# Altium PCB 九键触摸面板-触摸板-V1.PcbDoc
Units mm, origin at the board's own origin, x right, y up, seen from the top; angles counter-clockwise.
Board outline 77.48 x 77.48 mm, 2 copper layers (Top Layer, Bottom Layer), stack 1.571 mm thick; 46 components, 39 nets, 113 pads, 156 vias.
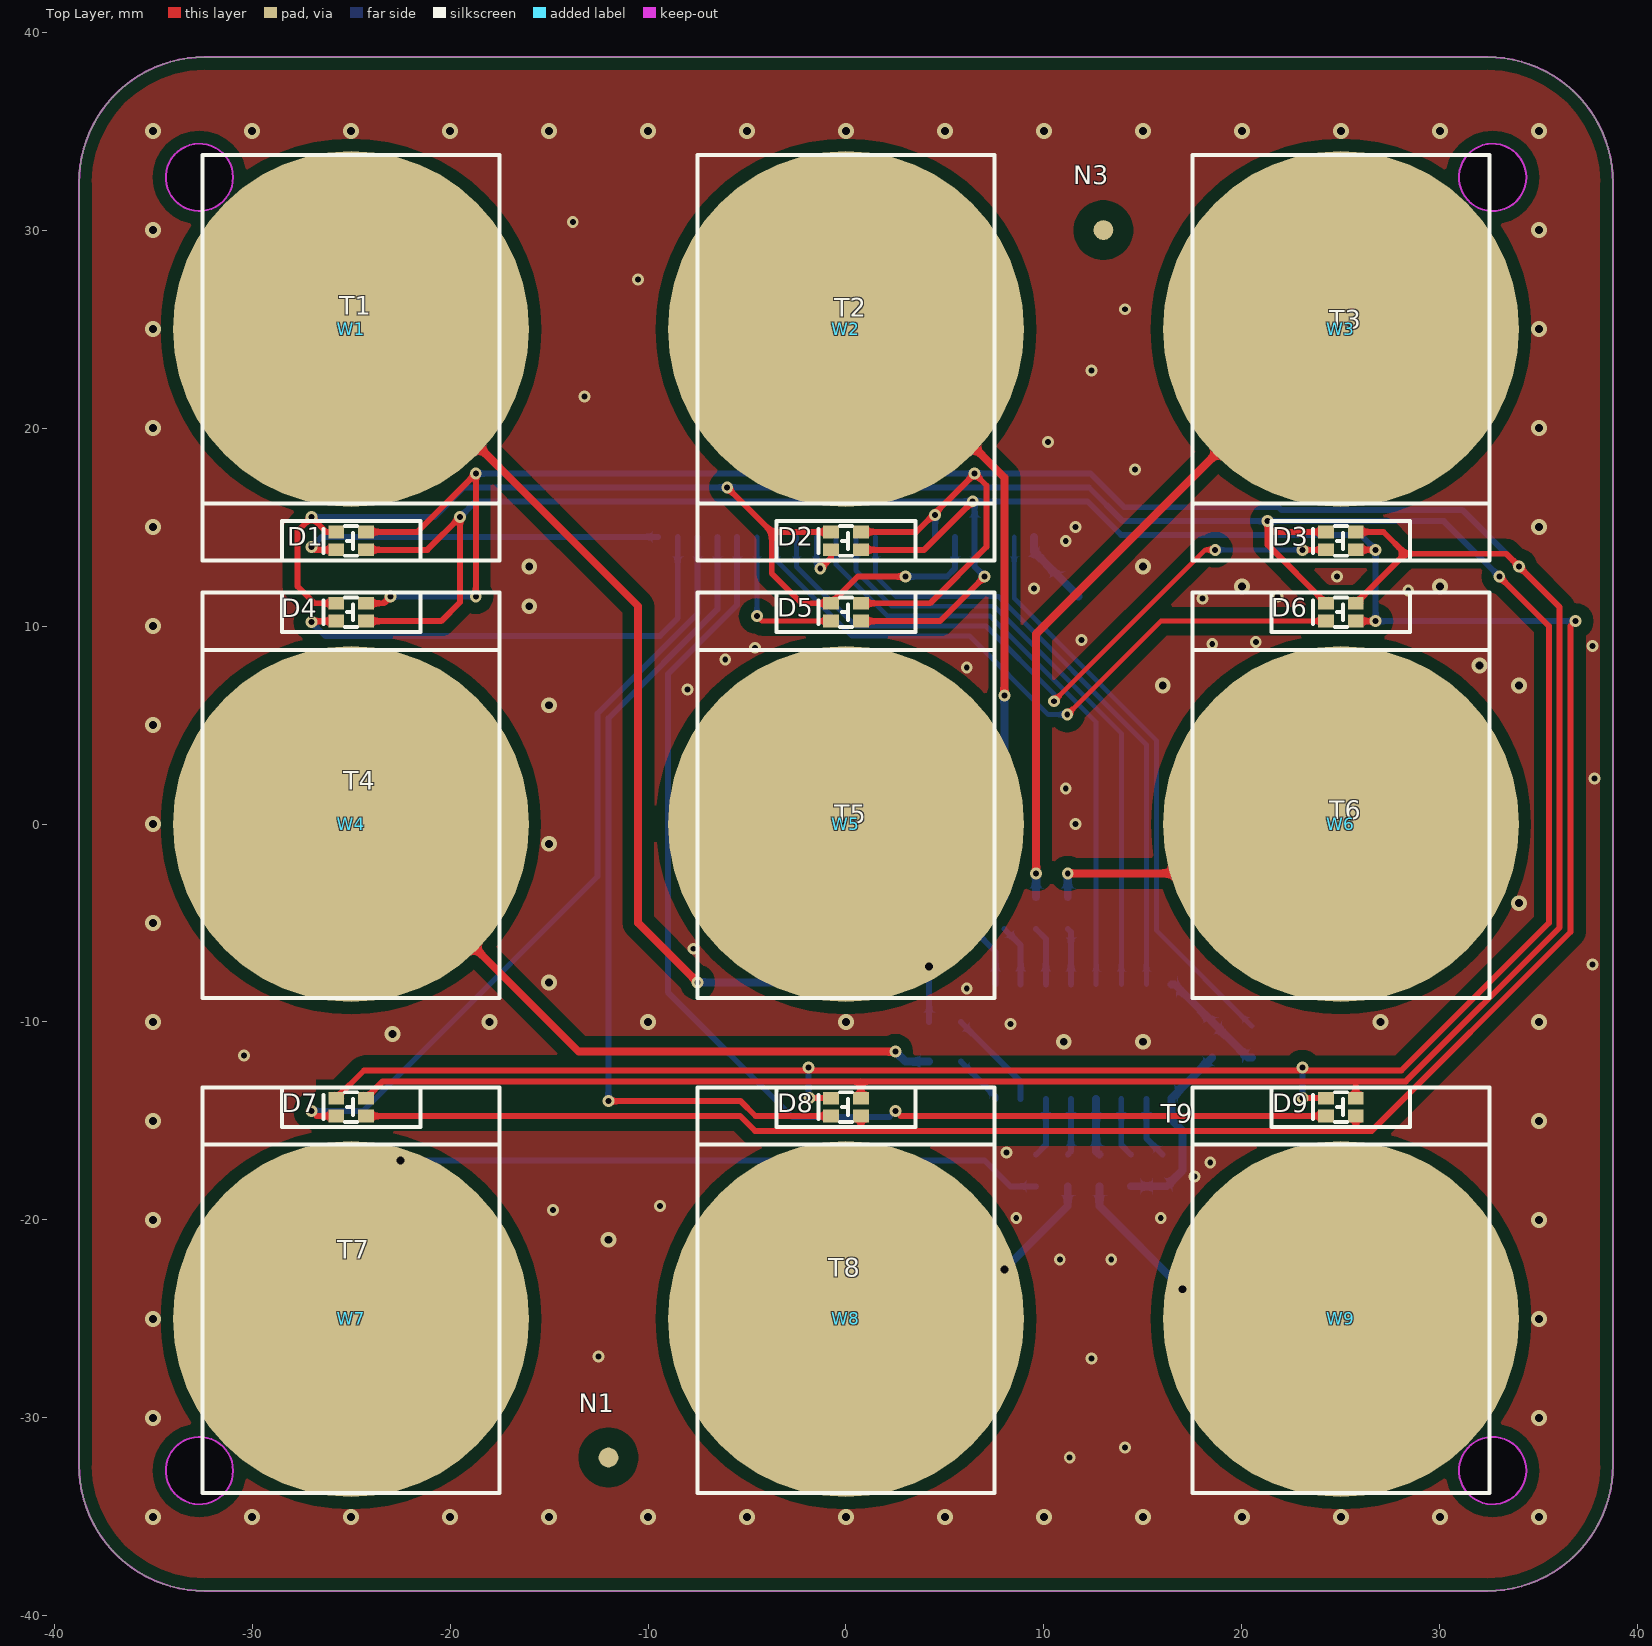
[diagram p0: Top Layer view]
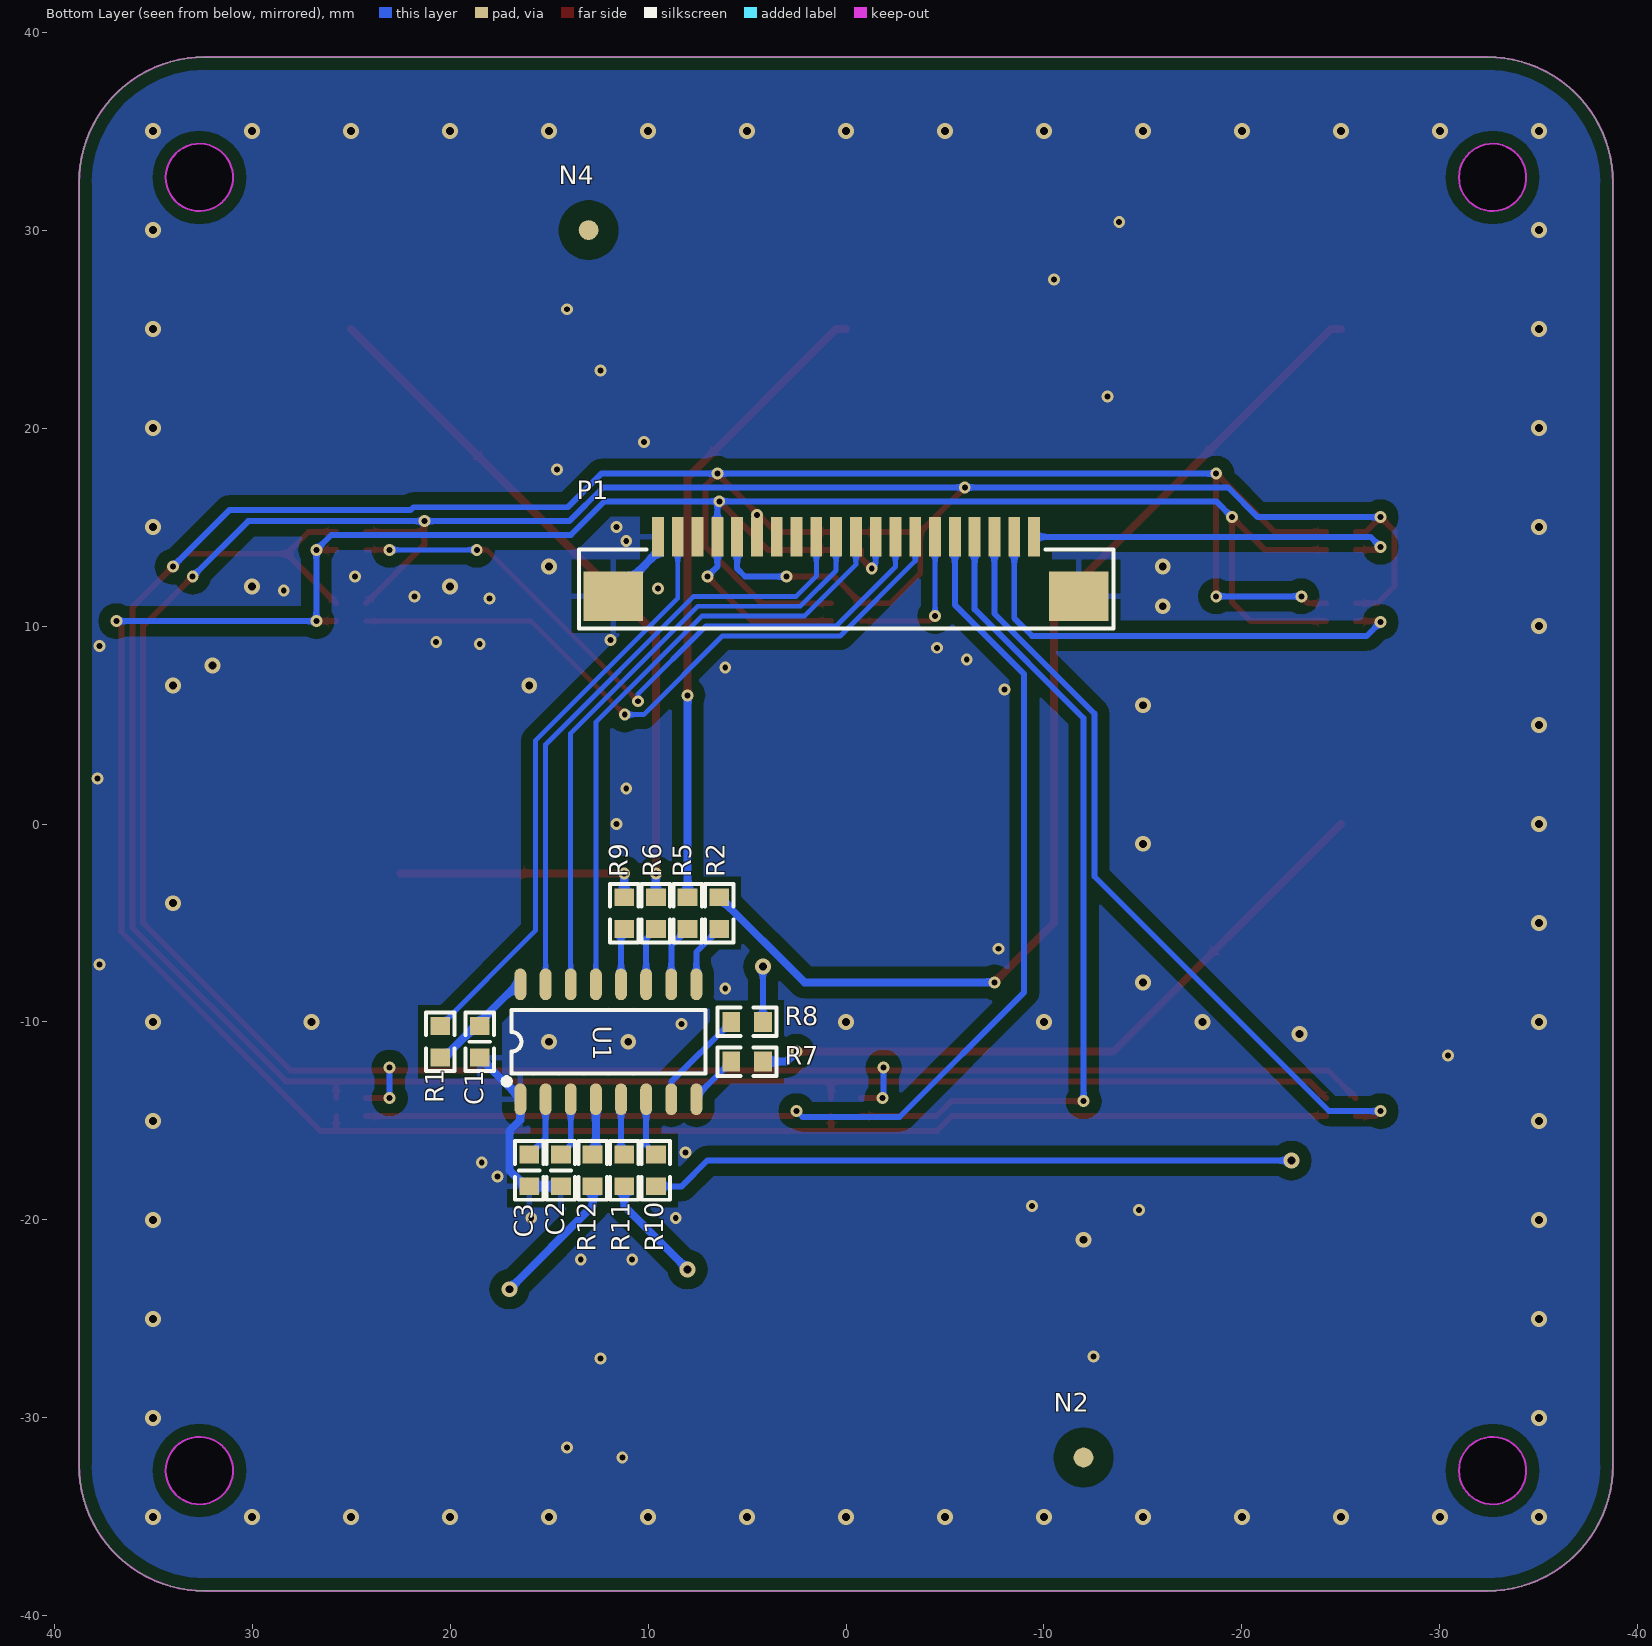
[diagram p1: Bottom Layer view, seen from below]
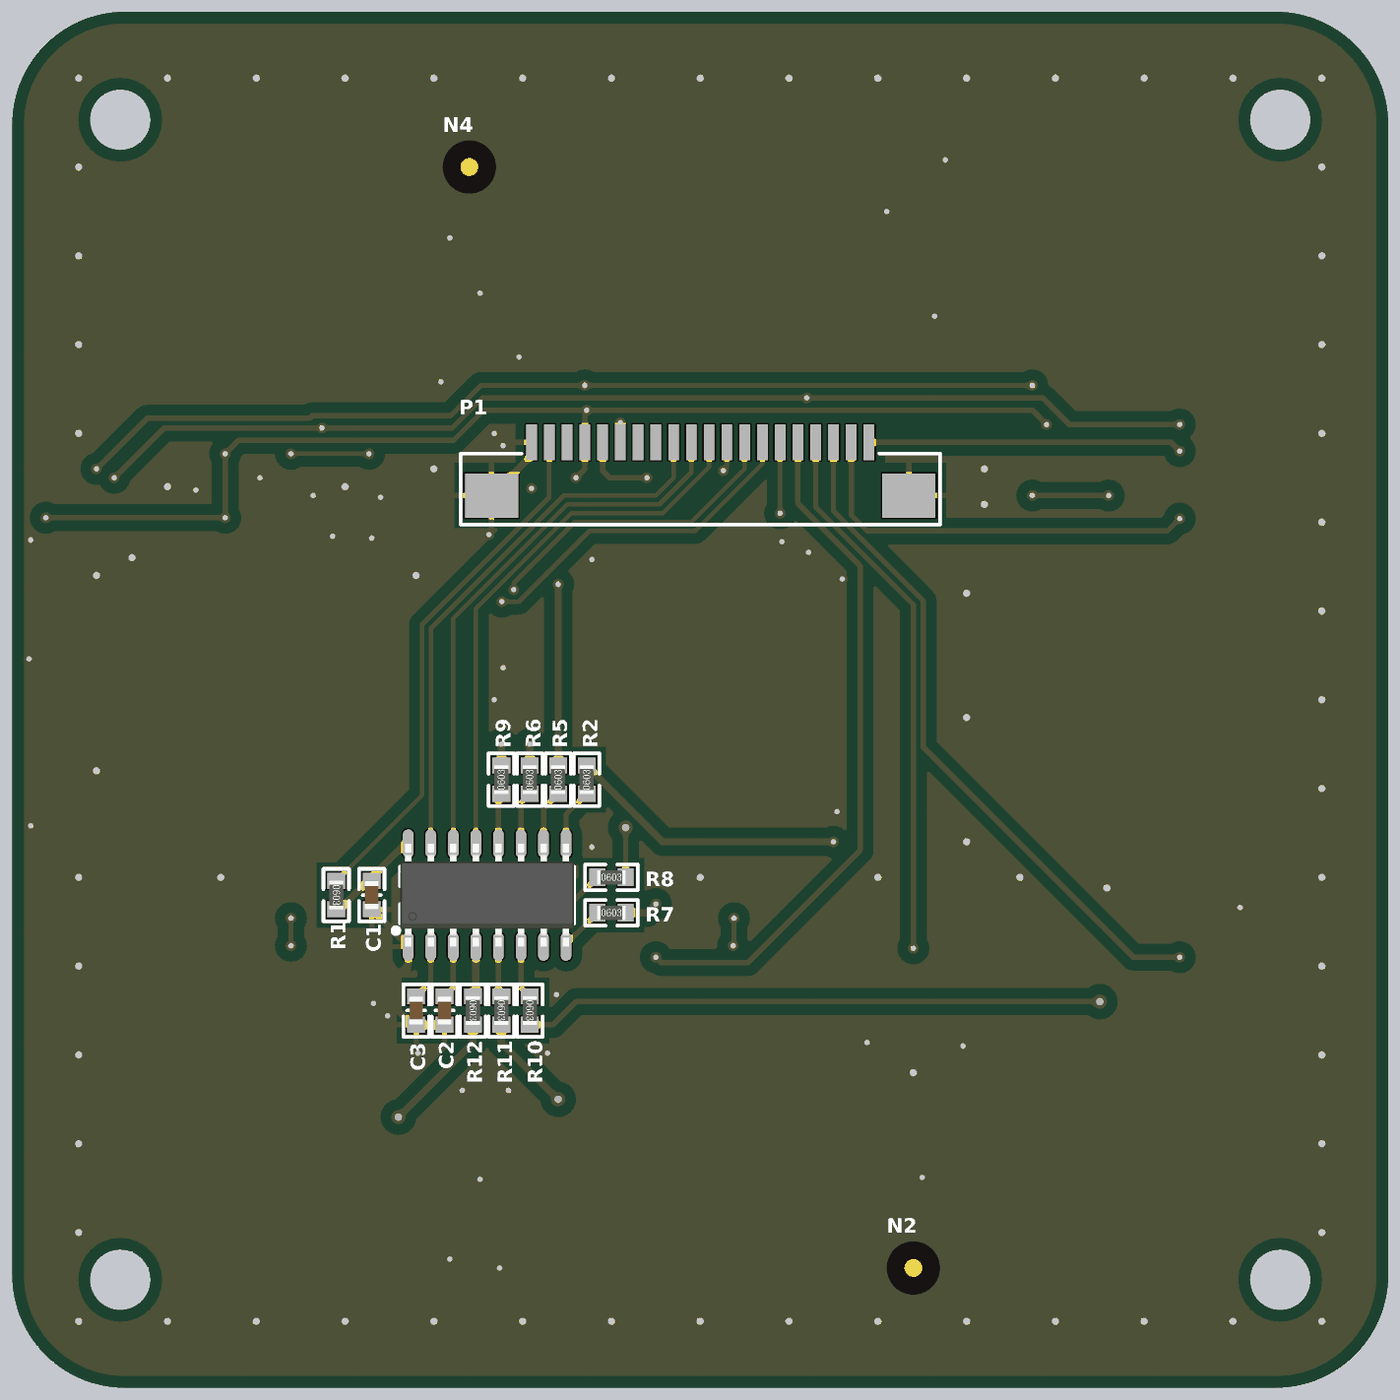
[diagram p2: 3D render of the assembled board from below, using the file's embedded part models]

## Layer stack, top to bottom
Top Solder: solder mask 0.0102, Solder Resist, Dk 3.5
Top Layer: signal copper 0.0356
Dielectric1: dielectric 1.5, FR-4, Dk 4.8
Bottom Layer: signal copper 0.0356
Bottom Solder: solder mask 0.0102, Solder Resist, Dk 3.5

## Board outline
-32.4,-38.74 cw(c-32.4,-32.4) -38.74,-32.4 -38.74,32.4 cw(c-32.4,32.4) -32.4,38.74 32.4,38.74 cw(c32.4,32.4) 38.74,32.4 38.74,-32.4 cw(c32.4,-32.4) 32.4,-38.74
cut-out: -32.663,30.963 cw(c-32.663,32.663) -34.363,32.663 cw(c-32.663,32.663) -32.663,34.362 cw(c-32.663,32.663) -30.963,32.663 cw(c-32.663,32.663)
cut-out: 32.662,30.963 cw(c32.662,32.663) 30.962,32.663 cw(c32.662,32.663) 32.662,34.362 cw(c32.662,32.663) 34.362,32.663 cw(c32.662,32.663)
cut-out: -32.663,-34.362 cw(c-32.663,-32.663) -34.363,-32.663 cw(c-32.663,-32.663) -32.663,-30.963 cw(c-32.663,-32.663) -30.963,-32.663 cw(c-32.663,-32.663)
cut-out: 30.962,-32.663 ccw(c32.662,-32.663) 32.662,-34.362 ccw(c32.662,-32.663) 34.362,-32.663 ccw(c32.662,-32.663) 32.662,-30.963 ccw(c32.662,-32.663)

## Design rules (kind name [scope] priority, off if disabled: settings)
Clearance Clearance敷铜间隔 [InPolygon] p1: gap=0.6
Clearance Clearance通用间隔 [All] p2: gap=0.25
PlaneConnect [All] p1: planeconnectstyle=Relief reliefexpansion=0.508 reliefentries=4 reliefconductorwidth=0.3 reliefairgap=0.3
PolygonConnect PolygonConnect_过孔 [All vs IsVia] p1: connectstyle=Direct reliefconductorwidth=0.254 reliefentries=4 polygonreliefangle="90 Angle" airgapwidth=0.254
PolygonConnect [All] p2: connectstyle=Relief reliefconductorwidth=0.3 reliefentries=4 polygonreliefangle="90 Angle" airgapwidth=0.6
RoutingVias [All] p1: holewidth=0.5 width=1 viastyle="Through Hole" minholewidth=0.4 minwidth=0.8 maxholewidth=10 maxwidth=10
SolderMaskExpansion [All] p1: expansion=0.102
Width [All] p1: maxlimit=10 minlimit=0.25 preferedwidth=0.5
29 further rules are at their usual default settings.

## Components (designator, comment, footprint, x,y, rotation, side; value= is the part's Value field where it differs from the comment)
C1 "224" C-0603 18.5,-11 r90 bottom
C2 "4.7p" C-0603 14.4,-17.5 r90 bottom
C3 "472" C-0603 16,-17.5 r90 bottom
D1 "LED-1615-三色" LED-1615-三色 -25,14.3 r270 top
D2 "LED-1615-三色" LED-1615-三色 0,14.3 r270 top
D3 "LED-1615-三色" LED-1615-三色 25,14.3 r270 top
D4 "LED-1615-三色" LED-1615-三色 -25,10.7 r270 top
D5 "LED-1615-三色" LED-1615-三色 0,10.7 r270 top
D6 "LED-1615-三色" LED-1615-三色 25,10.7 r270 top
D7 "LED-1615-三色" LED-1615-三色 -25,-14.3 r270 top
D8 "LED-1615-三色" LED-1615-三色 0,-14.3 r270 top
D9 "LED-1615-三色" LED-1615-三色 25,-14.3 r270 top
N1 "光学定位点" MARK-1mm-3mm -12,-32 r0 top
N2 "光学定位点" MARK-1mm-3mm -12,-32 r180 bottom
N3 "光学定位点" MARK-1mm-3mm 13,30 r0 top
N4 "光学定位点" MARK-1mm-3mm 13,30 r180 bottom
P1 "FPC-1.0-20P" FPC-1.0mm_20P下接翻盖 0,13 r0 bottom
R1 "20" R-0603 20.5,-11 r270 bottom
R2 "1K" R-0603 6.4,-4.5 r90 bottom
R5 "1K" R-0603 8,-4.5 r90 bottom
R6 "1K" R-0603 9.6,-4.5 r90 bottom
R7 "1K" R-0603 5,-12 r180 bottom
R8 "1K" R-0603 5,-10 r180 bottom
R9 "1K" R-0603 11.2,-4.5 r90 bottom
R10 "1K" R-0603 9.6,-17.5 r270 bottom
R11 "1K" R-0603 11.2,-17.5 r270 bottom
R12 "1K" R-0603 12.8,-17.5 r270 bottom
T1 "" 焊点1mm -25,25 r0 top
T2 "" 焊点1mm 0,25 r0 top locked
T3 "" 焊点1mm 25,25 r0 top locked
T4 "" 焊点1mm -25,0 r0 top locked
T5 "" 焊点1mm 0,0 r0 top locked
T6 "" 焊点1mm 25,0 r0 top locked
T7 "" 焊点1mm -25,-25 r0 top locked
T8 "" 焊点1mm 0,-25 r0 top locked
T9 "" 焊点1mm 25,-25 r0 top locked
U1 "XW09A" SOP-16-M 12,-11 r180 bottom
W1 "导光板" 导光板20.5*15*2 -25,25 r0 top locked
W2 "导光板" 导光板20.5*15*2 0,25 r0 top locked
W3 "导光板" 导光板20.5*15*2 25,25 r0 top locked
W4 "导光板" 导光板20.5*15*2 -25,0 r180 top locked
W5 "导光板" 导光板20.5*15*2 0,0 r180 top locked
W6 "导光板" 导光板20.5*15*2 25,0 r180 top locked
W7 "导光板" 导光板20.5*15*2 -25,-25 r180 top locked
W8 "导光板" 导光板20.5*15*2 0,-25 r180 top locked
W9 "导光板" 导光板20.5*15*2 25,-25 r180 top locked

## Footprints (in the part's own frame and the unit in brackets; to place one, negate y for a bottom-side part, rotate by r counter-clockwise, add the part's x,y. Pads: shape width x height; smd on the part's side, far side on the other; paste and mask are expansions set on the pad)
C-0603 [mm]
  rect 0.9x1 smd: 1(-0.8,0) 2(0.8,0)
  silkscreen extent -1.48,-0.72 1.48,0.72, body extent -0.8,-0.4 0.8,0.4, height 0.6
FPC-1.0mm_20P下接翻盖 [mm]
  rect 0.6x2 smd: 1(-9.5,-1.5) 2(-8.5,-1.5) 3(-7.5,-1.5) 4(-6.5,-1.5) 5(-5.5,-1.5) 6(-4.5,-1.5) 7(-3.5,-1.5) 8(-2.5,-1.5) 9(-1.5,-1.5) 10(-0.5,-1.5) 11(0.5,-1.5) 12(1.5,-1.5) 13(2.5,-1.5) 14(3.5,-1.5) 15(4.5,-1.5) 16(5.5,-1.5) 17(6.5,-1.5) 18(7.5,-1.5) 19(8.5,-1.5) 20(9.5,-1.5)
  rect 3x2.5 smd: 21(11.75,1.5) 22(-11.75,1.5)
  silkscreen extent -13.51,-0.86 13.49,3.13
LED-1615-三色 [mm]
  rect 0.65x0.8 smd: 1(-0.45,-0.75) 2(0.45,-0.75) 3(0.45,0.75) 4(-0.45,0.75)
  silkscreen extent -0.75,-1.4 0.75,0.3, body extent -0.75,-0.8 0.75,0.8, height 0.55
MARK-1mm-3mm [mm]
  round 1 smd paste-0.6 mask+1: 1(0,0)
  Top Layer pour cut-out: -1.5,0 -1.386,-0.574 -1.061,-1.061 -0.574,-1.386 0,-1.5 0,-1.5 0.574,-1.386 1.061,-1.061 1.386,-0.574 1.5,0 1.5,0 1.386,0.574 1.061,1.061 0.574,1.386 0,1.5 0,1.5 -0.574,1.386 -1.061,1.061 -1.386,0.574 -1.5,0
R-0603 [mm]
  rect 0.9x1 smd: 1(-0.8,0) 2(0.8,0)
  silkscreen extent -1.48,-0.72 1.48,0.72, body extent -0.8,-0.4 0.8,0.4, height 0.45
SOP-16-M [mm]
  oval 0.6x1.6 smd: 1(-4.445,-2.9) 2(-3.175,-2.9) 3(-1.905,-2.9) 4(-0.635,-2.9) 5(0.635,-2.9) 6(1.905,-2.9) 7(3.175,-2.9) 8(4.445,-2.9) 9(4.445,2.9) 10(3.175,2.9) 11(1.905,2.9) 12(0.635,2.9) 13(-0.635,2.9) 14(-1.905,2.9) 15(-3.175,2.9) 16(-4.445,2.9)
  silkscreen extent -5.43,-2.3 4.9,1.6, body extent -4.9,-2.9 4.9,2.9, height 1.75
导光板20.5*15*2 [mm]
  silkscreen extent -7.5,-11.7 7.5,8.8, body extent -7.5,-11.7 7.5,8.8, height 2
焊点1mm [mm]
  round 18 smd: 1(0,0)

## Part data
C1 C2 C3: library part Cap-0603, "0805"
N1 N2 N3 N4: library part 无引脚
P1: library part "Header 22", "Header, 22-Pin"
R1 R2 R5 R6 R7 R8 R9 R10 R11 R12: library part Res2-0603, "0603"
T1 T2 T3 T4 T5 T6 T7 T8 T9: library part 测试点

## Via types
v1: diameter 0.6, hole 0.3, Top Layer to Bottom Layer, tented both sides, 80 vias
v2: diameter 0.8, hole 0.4, Top Layer to Bottom Layer, tented both sides, 76 vias

## Nets (pads, with @x,y where several pads share a name; then routed paths per layer and width w, separated by ;. In a path a pad name is that pad's centre, name@x,y a point inside that pad or via, vN(x,y) a via of type N, cw(c..) or ccw(c..) an arc to the next point about the centre after c; other vN are vias at no path point)
3.3V: P1.19 R1.1 | length 29.7
  Bottom Layer w0.25: P1.19 8.5,11.4 15.675,4.225 15.675,-5.375 R1.1
5V: P1.18
B: D1.4 D2.4 D3.4 D4.4 D5.4 D6.4 D7.4 D8.4 D9.4 P1.15 | length 190
  Top Layer w0.3: D7.4 -23.4,-13 0.75,-13 ; D4.4 -23.35,11.15 v1(-23,11.5) ; D1.4 -21.65,14.75 v1(-18.7,17.7) v1(-18.7,11.5) ; D8.4 0.75,-13 ; D5.4 4.25,11.15 7.1,14 7.1,17.1 v1(6.5,17.7) 3.55,14.75 D2.4 ; D9.4 25.75,-13.05 ; D6.4 28.25,13.65 ; D3.4 27.15,14.75 28.25,13.65 ; 0.75,-13 28.278,-13 36.05,-5.228 36.05,10.95 v1(34,13) 33.35,13.65 28.25,13.65
  Bottom Layer w0.3: v1(-23,11.5) v1(-18.7,11.5) ; v1(-18.7,17.7) v1(6.5,17.7) 12.356,17.7 14.056,16 21.85,16 22,15.85 31.15,15.85 v1(34,13) ; P1.15 v1(4.5,15.6)
COM1: D1.2 P1.1 | length 19
  Top Layer w0.3: v1(-27,14) -26.85,13.85 D1.2
  Bottom Layer w0.3: v1(-27,14) -26.5,14.5 P1.1
COM2: D2.2 P1.9 | length 2.9
  Top Layer w0.3: v1(-1.3,12.9) -0.75,13.45 D2.2
  Bottom Layer w0.25: P1.9 -1.5,13.1 v1(-1.3,12.9)
COM3: D3.2 P1.8 | length 34.5
  Top Layer w0.25: v1(10.5,6.2) 18.15,13.85 v1(18.65,13.85) ; v1(23.05,13.85) D3.2
  Bottom Layer w0.25: P1.8 -2.5,13 0.5,10 7.072,10 10.5,6.572 v1(10.5,6.2) ; v1(18.65,13.85) v1(23.05,13.85)
COM4: D4.2 P1.2 | length 24.5
  Top Layer w0.3: v1(-27,10.2) -26.95,10.25 D4.2
  Bottom Layer w0.3: v1(-27,10.2) -26.3,9.5 -9.4,9.5 -8.5,10.4 P1.2
COM5: D5.2 P1.6 | length 7.9
  Top Layer w0.25: v1(-4.5,10.5) -4.25,10.25 D5.2
  Bottom Layer w0.25: v1(-4.5,10.5) P1.6
COM6: D6.2 P1.7 | length 34.1
  Top Layer w0.25: v1(11.175,5.525) 15.9,10.25 D6.2
  Bottom Layer w0.25: P1.7 -3.5,13.293 0.293,9.5 6.245,9.5 10.22,5.525 v1(11.175,5.525)
COM7: D7.2 P1.3 | length 40
  Top Layer w0.3: v1(-27,-14.5) -26.75,-14.75 D7.2
  Bottom Layer w0.3: v1(-27,-14.5) -24.4,-14.5 -12.55,-2.65 -12.55,5.572 -7.5,10.622 P1.3
COM8: D8.2 P1.4 | length 42.3
  Top Layer w0.3: v1(-12,-14) -5.322,-14 -4.572,-14.75 D8.2
  Bottom Layer w0.3: v1(-12,-14) -12,5.344 -6.5,10.844 P1.4
COM9: D9.2 P1.5 | length 60.5
  Top Layer w0.3: v1(2.5,-14.5) 2.75,-14.75 D9.2
  Bottom Layer w0.3: P1.5 -5.5,11.067 -9,7.567 -9,-8.5 -2.7,-14.8 2.2,-14.8 v1(2.5,-14.5)
G: D1.1 D2.1 D3.1 D4.1 D5.1 D6.1 D7.1 D8.1 D9.1 P1.16 | length 187.7
  Top Layer w0.3: D7.1 -24.35,-12.45 28.05,-12.45 35.5,-5 35.5,10 v1(33,12.5) ; D4.1 -26.85,11.15 -27.7,12 -27.7,14.8 v1(-27,15.5) -26.25,14.75 D1.1 ; v1(-6,17) -3.75,14.75 ; v1(-1.85,-13.85) D8.1 ; D2.1 -3.75,14.75 ; v1(3,12.5) 0.6,12.5 D5.1 -2.25,11.15 -3.75,12.65 -3.75,14.75 ; v1(21.3,15.3) 21.3,14.75 ; v1(23.05,-13.85) D9.1 ; D6.1 21.3,14.1 21.3,14.75 ; D3.1 21.3,14.75
  Bottom Layer w0.3: v1(-27,15.5) -20.8,15.5 -19.3,17 v1(-6,17) 12.278,17 13.978,15.3 v1(21.3,15.3) 30.2,15.3 v1(33,12.5) ; v1@-1.9,-13.8 v1(-1.9,-12.3) ; v1(3,12.5) 5.1,12.5 5.5,12.9 P1.16 ; v1(23.05,-13.85) v1(23.05,-12.3)
GND: C1.1 C2.1 C3.1 P1.20 P1.21 P1.22 U1.1 | length 13.6
  Bottom Layer w0.4: P1.20 9.5,13.75 P1.21 ; C2.1 C3.1 16.2,-18.3 17,-17.5 17,-15.5 16.445,-14.945 U1.1 16.445,-13.855 C1.1
  other v1: 11.3,-32 14.1,-31.5 12.4,-27 -12.5,-26.9 10.8,-22 13.4,-22 8.6,-19.9 15.9,-19.9 -14.8,-19.5 -9.4,-19.3 17.6,-17.8 18.4,-17.1 8.1,-16.6 -30.4,-11.7 8.3,-10.1 6.1,-8.3 37.7,-7.1 -7.7,-6.3 11.6,0 11.1,1.8 37.8,2.3 -8,6.8 6.1,7.9 -6.1,8.3 -4.6,8.9 37.7,9 18.5,9.1 20.7,9.2 11.9,9.3 18,11.4 21.8,11.5 28.4,11.8 9.5,11.9 24.8,12.5 11.1,14.3 11.6,15 14.6,17.9 10.2,19.3 -13.2,21.6 12.4,22.9 14.1,26 -10.5,27.5 -13.8,30.4
  other v2: -35,-35 -30,-35 -25,-35 -20,-35 -15,-35 -10,-35 -5,-35 0,-35 5,-35 10,-35 15,-35 20,-35 25,-35 30,-35 35,-35 -35,-30 35,-30 -35,-25 35,-25 -12,-21 -35,-20 35,-20 -35,-15 35,-15 11,-11 15,-11 -22.9,-10.6 -35,-10 -18,-10 -10,-10 0,-10 27,-10 35,-10 -15,-8 -35,-5 34,-4 -15,-1 -35,0 -35,5 -15,6 16,7 34,7 32,8 -35,10 -16,11 20,12 30,12 -16,13 15,13 -35,15 35,15 -35,20 35,20 -35,25 35,25 -35,30 35,30 -35,35 -30,35 -25,35 -20,35 -15,35 -10,35 -5,35 0,35 5,35 10,35 15,35 20,35 25,35 30,35 35,35
NetC1_2: C1.2 R1.2 U1.16 | length 5.6
  Bottom Layer w0.4: U1.16 16.6,-8.1 20.3,-11.8 R1.2
NetC2_2: C2.2 U1.3 | length 3
  Bottom Layer w0.3: U1.3 13.905,-16.205 C2.2
NetC3_2: C3.2 U1.2 | length 3.1
  Bottom Layer w0.3: U1.2 15.175,-15.875 C3.2
NetR2_1: R2.1 U1.9 | length 3.3
  Bottom Layer w0.3: R2.1 7.555,-6.455 U1.9
NetR2_2: R2.2 T1.1 | length 56.2
  Top Layer w0.4: T1.1 -24.5,25 -10.5,11 -10.5,-5 v1(-7.5,-8)
  Bottom Layer w0.4: v1(-7.5,-8) 2.1,-8 R2.2
NetR5_1: R5.1 U1.10 | length 3.1
  Bottom Layer w0.3: R5.1 8.825,-6.125 U1.10
NetR5_2: R5.2 T2.1 | length 32.3
  Top Layer w0.4: T2.1 0.5,25 8,17.5 v1(8,6.5)
  Bottom Layer w0.4: R5.2 v1(8,6.5)
NetR6_1: R6.1 U1.11 | length 3
  Bottom Layer w0.3: R6.1 10.095,-5.795 U1.11
NetR6_2: R6.2 T3.1 | length 35.1
  Top Layer w0.4: v1(9.6,-2.5) 9.6,9.6 T3.1
  Bottom Layer w0.4: R6.2 v1(9.6,-2.5)
NetR7_1: R7.1 U1.8 | length 2.6
  Bottom Layer w0.3: R7.1 7.555,-13.755 U1.8
NetR7_2: R7.2 T4.1 | length 34.2
  Top Layer w0.4: T4.1 -13.5,-11.5 v1(2.5,-11.5)
  Bottom Layer w0.4: v1(2.5,-11.5) 3,-12 R7.2
NetR8_1: R8.1 U1.7 | length 5.2
  Bottom Layer w0.3: R8.1 8.825,-13.025 U1.7
NetR8_2: R8.2 T5.1 | length 2.8
  Bottom Layer w0.3: R8.2 v2(4.2,-7.2)
NetR9_1: R9.1 U1.12 | length 2.9
  Bottom Layer w0.3: R9.1 11.365,-5.465 U1.12
NetR9_2: R9.2 T6.1 | length 12.5
  Top Layer w0.4: v1(11.2,-2.5) T6.1@22.5,-2.5
  Bottom Layer w0.4: R9.2 v1(11.2,-2.5)
NetR10_1: R10.1 U1.6 | length 3
  Bottom Layer w0.3: R10.1 10.095,-16.205 U1.6
NetR10_2: R10.2 T7.1 | length 32.6
  Bottom Layer w0.3: v2(-22.5,-17) 7,-17 8.3,-18.3 R10.2
NetR11_1: R11.1 U1.5 | length 2.9
  Bottom Layer w0.3: R11.1 11.365,-16.535 U1.5
NetR11_2: R11.2 T8.1 | length 5.5
  Bottom Layer w0.4: v2(8,-22.5) 11.2,-19.3 R11.2
NetR12_1: R12.1 U1.4 | length 2.9
  Bottom Layer w0.4: U1.4 12.635,-16.535 R12.1
NetR12_2: R12.2 T9.1 | length 6.9
  Bottom Layer w0.4: R12.2 12.8,-19.3 v2(17,-23.5)
R: D1.3 D2.3 D3.3 D4.3 D5.3 D6.3 D7.3 D8.3 D9.3 P1.17 | length 178.5
  Top Layer w0.3: D7.3 -5.35,-14.75 -4.6,-15.5 26.556,-15.5 36.6,-5.456 36.6,10 v1(36.85,10.25) ; D4.3 -20.45,10.25 -19.5,11.2 v1(-19.5,15.5) -21.15,13.85 D1.3 ; 0.75,-15.45 D8.3 ; D5.3 4.75,10.25 v1(7,12.5) ; D2.3 3.95,13.85 v1(6.4,16.3) ; 25.75,-15.472 D9.3 ; D6.3 v1(26.75,10.25) ; D3.3 v1(26.75,13.85)
  Bottom Layer w0.3: v1(-19.5,15.5) -18.7,16.3 v1(6.4,16.3) 12.2,16.3 13.9,14.6 26,14.6 v1(26.75,13.85) v1(26.75,10.25) v1(36.85,10.25) ; v1@6.5,16.2 P1.17 6.5,13 v1(7,12.5)
触摸-INT: P1.10 U1.13 | length 31.1
  Bottom Layer w0.25: P1.10 -0.5,13.1 2.1,10.5 7.279,10.5 12.635,5.144 U1.13
触摸-SCL: P1.11 U1.14 | length 31.2
  Bottom Layer w0.25: P1.11 0.5,12.807 2.307,11 7.486,11 13.905,4.581 U1.14
触摸-SDA: P1.12 U1.15 | length 31.3
  Bottom Layer w0.25: P1.12 1.5,12.514 2.514,11.5 7.693,11.5 15.175,4.018 U1.15
pads on no net: N1.1 N2.1 N3.1 N4.1 P1.13 P1.14

## Polygon pours and split planes (outlines as drawn)
GND on Top Layer "Bottom Layer-No Net" (solid, remove dead copper, pour order 4): -38.5,38.5 38.5,38.5 38.5,-38.5 -38.5,-38.5
GND on Bottom Layer "Bottom Layer-No Net" (solid, remove dead copper, pour order 10): -38.5,38.5 38.5,38.5 38.5,-38.5 -38.5,-38.5

## Keep-outs
Keep-Out Layer:
  circle w0.1: c-32.663,32.663 r1.7
  circle w0.1: c32.662,32.663 r1.7
  circle w0.1: c-32.663,-32.663 r1.7
  circle w0.1: c32.662,-32.663 r1.7
  lines w0.1: -38.74,-32.4 ccw(c-32.4,-32.4) -32.4,-38.74 32.4,-38.74 ccw(c32.4,-32.4) 38.74,-32.4 38.74,32.4 ccw(c32.4,32.4) 32.4,38.74 -32.4,38.74 ccw(c-32.4,32.4) -38.74,32.4 -38.74,-32.4

## Silkscreen, mask and mechanical layers (free items; w line width, h text height)
Mechanical 15:
  lines w0.2: -48.312,-125.116 39.688,-125.116 ; -48.312,-119.116 39.688,-119.116 ; -48.312,-113.116 39.688,-113.116 ; -48.312,-107.116 39.688,-107.116 ; -48.312,-101.116 39.688,-101.116 ; -48.312,-95.116 39.688,-95.116 ; -48.312,-89.116 39.688,-89.116 ; -26.312,-131.116 -26.312,-83.116 -26.312,-77.116 ; -48.312,-83.116 -48.312,-131.116 39.688,-131.116 39.688,-83.116 ; -48.312,-83.116 39.688,-83.116 ; -48.312,-83.116 -48.312,-77.116 39.688,-77.116 39.688,-83.116
  text "公司" at -47.312,-82.116 h5
  text "杭州久天科技有限公司" at -23.312,-82.116 h5
  text "工程" at -47.312,-88.116 h5
  text "设计" at -47.312,-94.116 h5
  text "邵宁鹏" at -23.312,-94.116 h5
  text "日期" at -47.312,-100.116 h5
  text "1.6mm" at -23.312,-106.1 h5
  text "板厚" at -47.312,-106.116 h5
  text "阻焊油" at -47.312,-112.116 h5
  text "绿色" at -23.312,-112.116 h5
  text "丝印" at -47.312,-118.116 h5
  text "白色" at -23.312,-118.116 h5
  text "板材" at -47.312,-124.116 h5
  text "FR-4" at -23.312,-124.116 h5
  text "其他" at -47.312,-130.116 h5
  text "有铅喷锡，过孔盖油" at -23.312,-130.116 h5

## Dimensions
32.4,-38.74 to 32.4,38.74 on Mechanical 15
-38.74,-32.4 to 38.74,-32.4 on Mechanical 15